# EAGLE board pubsub_lower_isolate 5V (EAGLE 9.4.2)
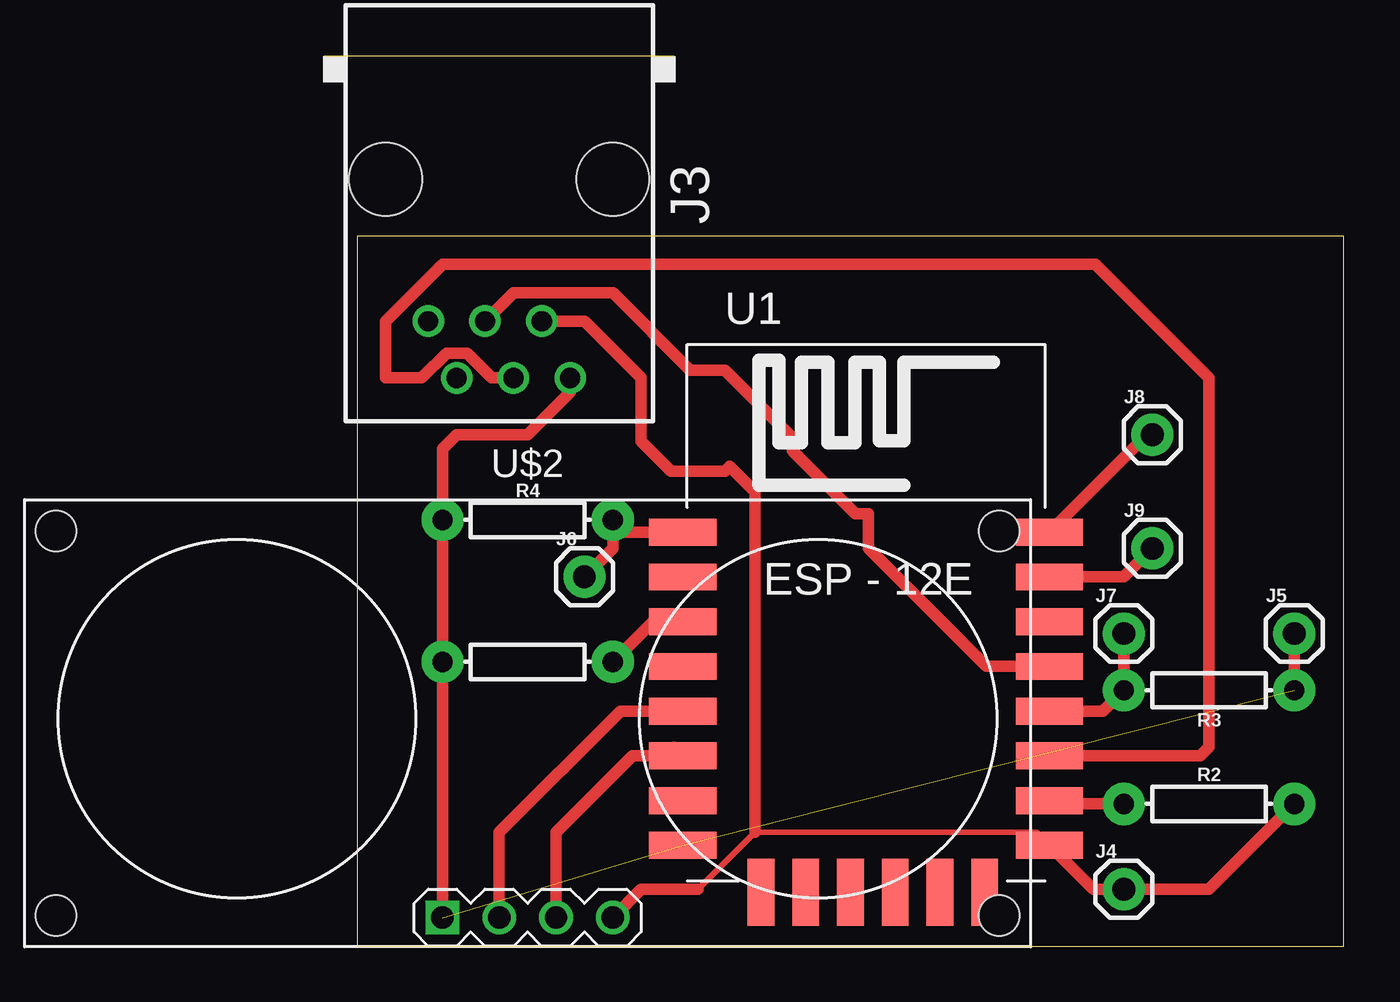
[diagram p0: board, top side]

Size 44.12 x 31.74 mm. Coordinates in mm from the lower left corner, seen from the top.
Outline: 0,0 44.12,0 44.12,31.74 0,31.74 0,0
Copper layers (1*16): Top 0.035mm / dielectric 1.5mm / Bottom 0.035mm
Design rules "default": minimum track width 6mil, minimum drill 0.35mm, track to track 6mil, track to pad 6mil, pad to pad 6mil, via to via 6mil, smd to smd 6mil, copper to edge 40mil, drill to drill 6mil, minimum pad ring 10mil, minimum via ring 8mil, stop-mask expansion 4mil, vias tented up to drill 0mil, thermal gap 10mil

## Footprints (pad centres in the part's own frame; a part is rotated, then mirrored left to right if it is on the bottom)
RJ11-NO_SHIELD = drill 0.9 pad 1.4: 1 -3.175,8.89; 2 -1.905,6.35; 3 -0.635,8.89; 4 0.635,6.35; 5 1.905,8.89; 6 3.175,6.35 | hole 3.251: -5.08,0; 5.08,0
1X01 = drill 1.016 pad 1.88: 1 0,0
AXIAL-0.3 = drill 0.9 pad 1.88: P$1 -3.81,0; P$2 3.81,0
ESP12E-SMD = smd 3 x 1.2: ADC -8.3,3.8; CH_PD -8.3,1.8; GND 8.1,-8.2; GPIO0 8.1,-2.2; GPIO2 8.1,-4.2; GPIO4 8.1,-0.2; GPIO5 8.1,1.8; GPIO12 -8.3,-4.2; GPIO13 -8.3,-6.2; GPIO14 -8.3,-2.2; GPIO15 8.1,-6.2; GPIO16 -8.3,-0.2; RESET -8.3,5.8; RXD0 8.1,3.8; TXD0 8.1,5.8; VCC -8.3,-8.2 | smd 1.2 x 3: CS0 -4.8,-10.3; GPIO9 -0.8,-10.3; GPIO10 1.2,-10.3; MISO -2.8,-10.3; MOSI 3.2,-10.3; SCLK 5.2,-10.3
ULTRASONIC-HC-SR04 = drill 1 square: 1 -3.81,-8.89 | drill 1: 2 -1.27,-8.89; 3 1.27,-8.89; 4 3.81,-8.89 | hole 1.8: -21.1,8.4; -21.1,-8.8; 21.1,-8.8; 21.1,8.4

## Placement (x,y rotation side)
J3  RJ11-6L-B  [RJ11-NO_SHIELD]  6.35,34.29 180 top
J4  [1X01]  34.29,2.54 0 top
J5  [1X01]  41.91,13.97 0 top
J6  [1X01]  10.16,16.51 0 top
J7  [1X01]  34.29,13.97 0 top
J8  [1X01]  35.56,22.86 0 top
J9  [1X01]  35.56,17.78 0 top
R2  1k  [AXIAL-0.3]  38.1,6.35 0 top
R3  1k  [AXIAL-0.3]  38.1,11.43 180 top
R4  1k  [AXIAL-0.3]  7.62,19.05 0 top
R5  1k  [AXIAL-0.3]  7.62,12.7 0 top
U1  [ESP12E-SMD]  22.86,12.7 0 top
U$2  ULTRASONIC-HC-SR04  [ULTRASONIC-HC-SR04]  7.62,10.16 0 top

## Library data of the parts
J3 = con-tycoelectronics; MF: TYCO ELECTRONICS; MPN: RJ11-6L-B; OC_FARNELL: unknown; OC_NEWARK: 52K3613
J4-J9 = SparkFun-Connectors
R2-R5 = SparkFun-Resistors; PROD_ID: RES-12182
U1 = esp8266modules
U$2 = diy-modules

## Nets
+5V: J3.1 J5.1 R3.P$1 R4.P$1 R5.P$1 U1.VCC U$2.1
GND: J3.2 J4.1 R2.P$2 U1.GND U$2.4
N$1: J3.4 U1.GPIO4
N$2: R2.P$1 U1.GPIO15
N$4: J7.1 R3.P$2 U1.GPIO0
N$5: J9.1 U1.RXD0
N$6: U1.GPIO12 U$2.3
N$13: J3.3 U1.GPIO2
N$14: U1.GPIO14 U$2.2
N$15: J8.1 U1.TXD0
N$16: J6.1 R4.P$2 U1.RESET
N$17: R5.P$2 U1.CH_PD

## Tracks (layer width: path | path; a pad name or v marks a point on that pad's centre or on a via)
+5V  (2 unrouted)
  Top 0.508: J5.1 R3.P$1 | U$2.1 R5.P$1 R4.P$1 3.81,22.23 4.45,22.86 7.62,22.86 9.53,24.77 J3.1
GND
  Top 0.254: 15.24,2.54 17.78,5.08 30.38,5.08 U1.GND
  Top 0.508: U1.GND 32.92,2.54 J4.1 38.1,2.54 R2.P$2 | U$2.4 12.7,2.54 15.24,2.54 | 17.78,5.08 17.78,20.32 16.65,21.45 16.44,21.23 14.04,21.23 12.7,22.57 12.7,25.4 10.16,27.94 J3.2
N$1
  Top 0.508: U1.GPIO4 28.14,12.5 22.86,17.78 22.86,19.34 22.28,19.34 19.47,22.14 19.47,22.72 16.44,25.76 14.88,25.76 11.43,29.21 6.98,29.21 J3.4
N$2
  Top 0.508: R2.P$1 31.11,6.35 U1.GPIO15
N$4
  Top 0.508: J7.1 R3.P$2 33.36,10.5 U1.GPIO0
N$5
  Top 0.508: U1.RXD0 34.29,16.51 J9.1
N$6
  Top 0.508: 14.17,8.89 U1.GPIO12 12.31,8.5 8.89,5.08 U$2.3
N$13
  Top 0.508: U1.GPIO2 37.71,8.5 38.1,8.89 38.1,25.4 33.02,30.48 3.81,30.48 1.27,27.94 1.27,25.4 2.88,25.4 3.98,26.51 4.91,26.51 6.02,25.4 J3.3
N$14
  Top 0.508: U$2.2 6.35,5.08 11.77,10.5 U1.GPIO14
N$15
  Top 0.508: U1.TXD0 35.32,22.86 J8.1
N$16
  Top 0.508: U1.RESET 11.98,18.5 R4.P$2 11.43,17.78 J6.1
N$17
  Top 0.508: R5.P$2 13.23,14.5 U1.CH_PD